# Altium PCB device_plate.PcbDoc
Units mm, origin at the board's own origin, x right, y up, seen from the top; angles counter-clockwise.
Board outline 42.5 x 25 mm, 2 copper layers (Top Layer, Bottom Layer), stack 1.5 mm thick; 22 components, 22 nets, 106 pads, 0 vias.
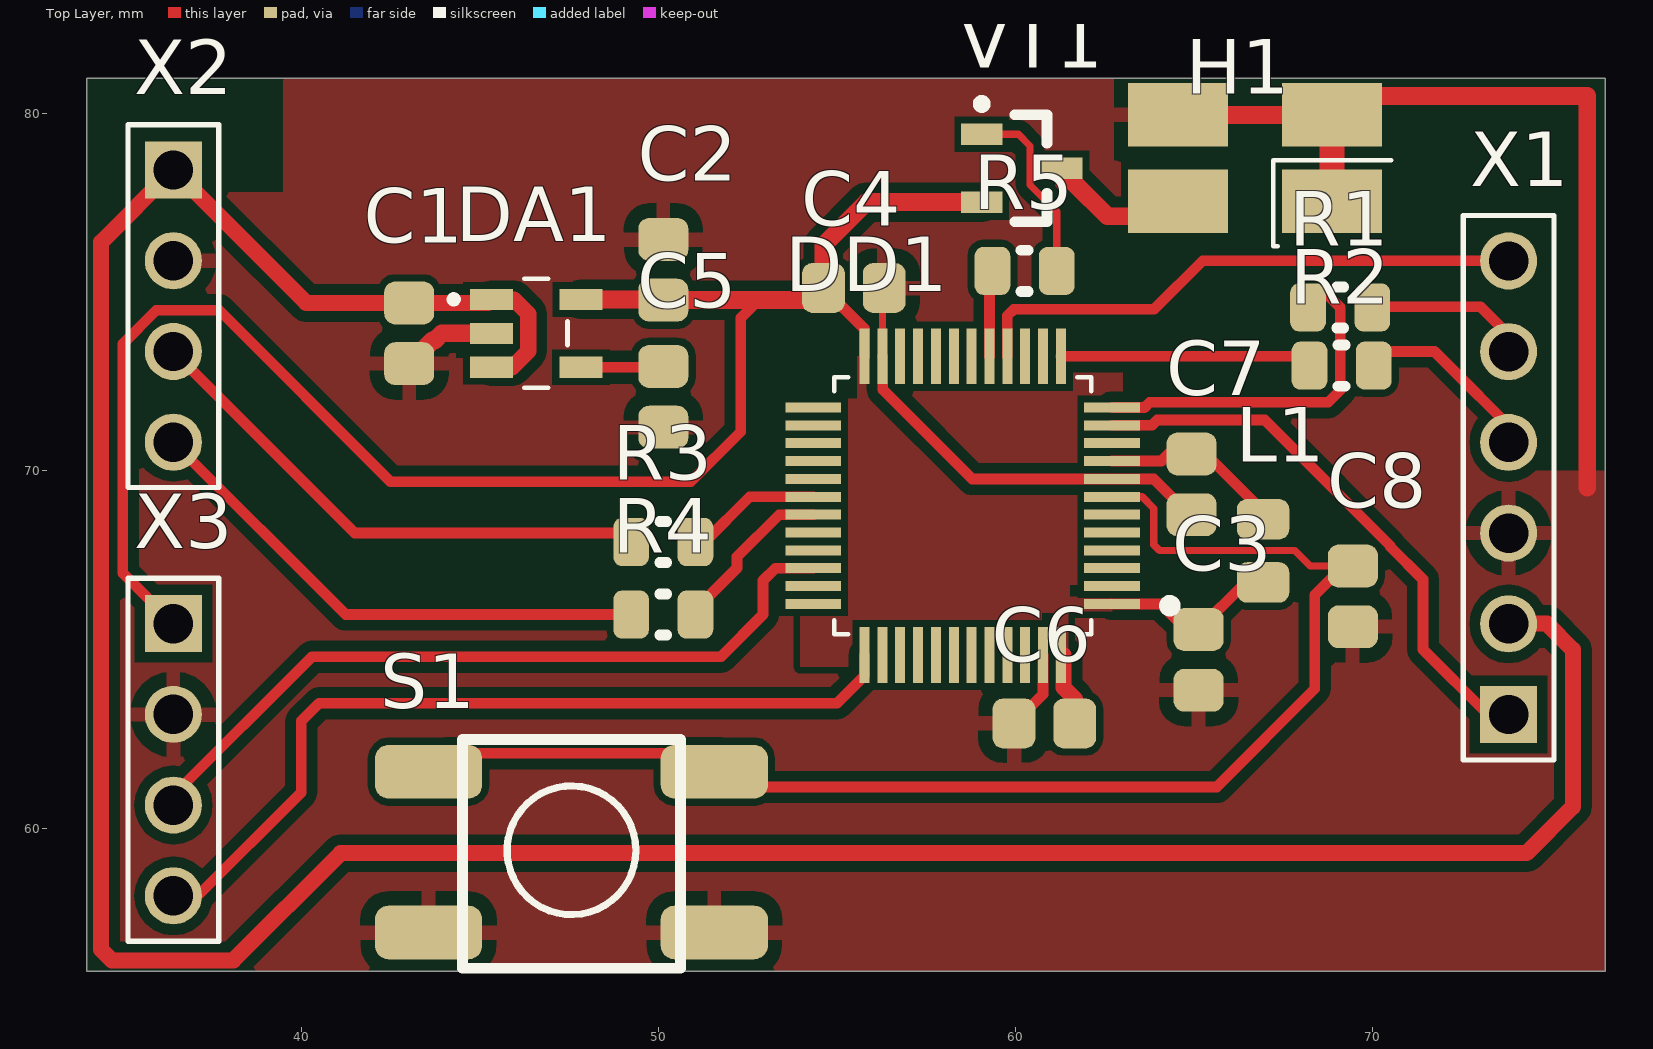
[diagram p0: Top Layer view]
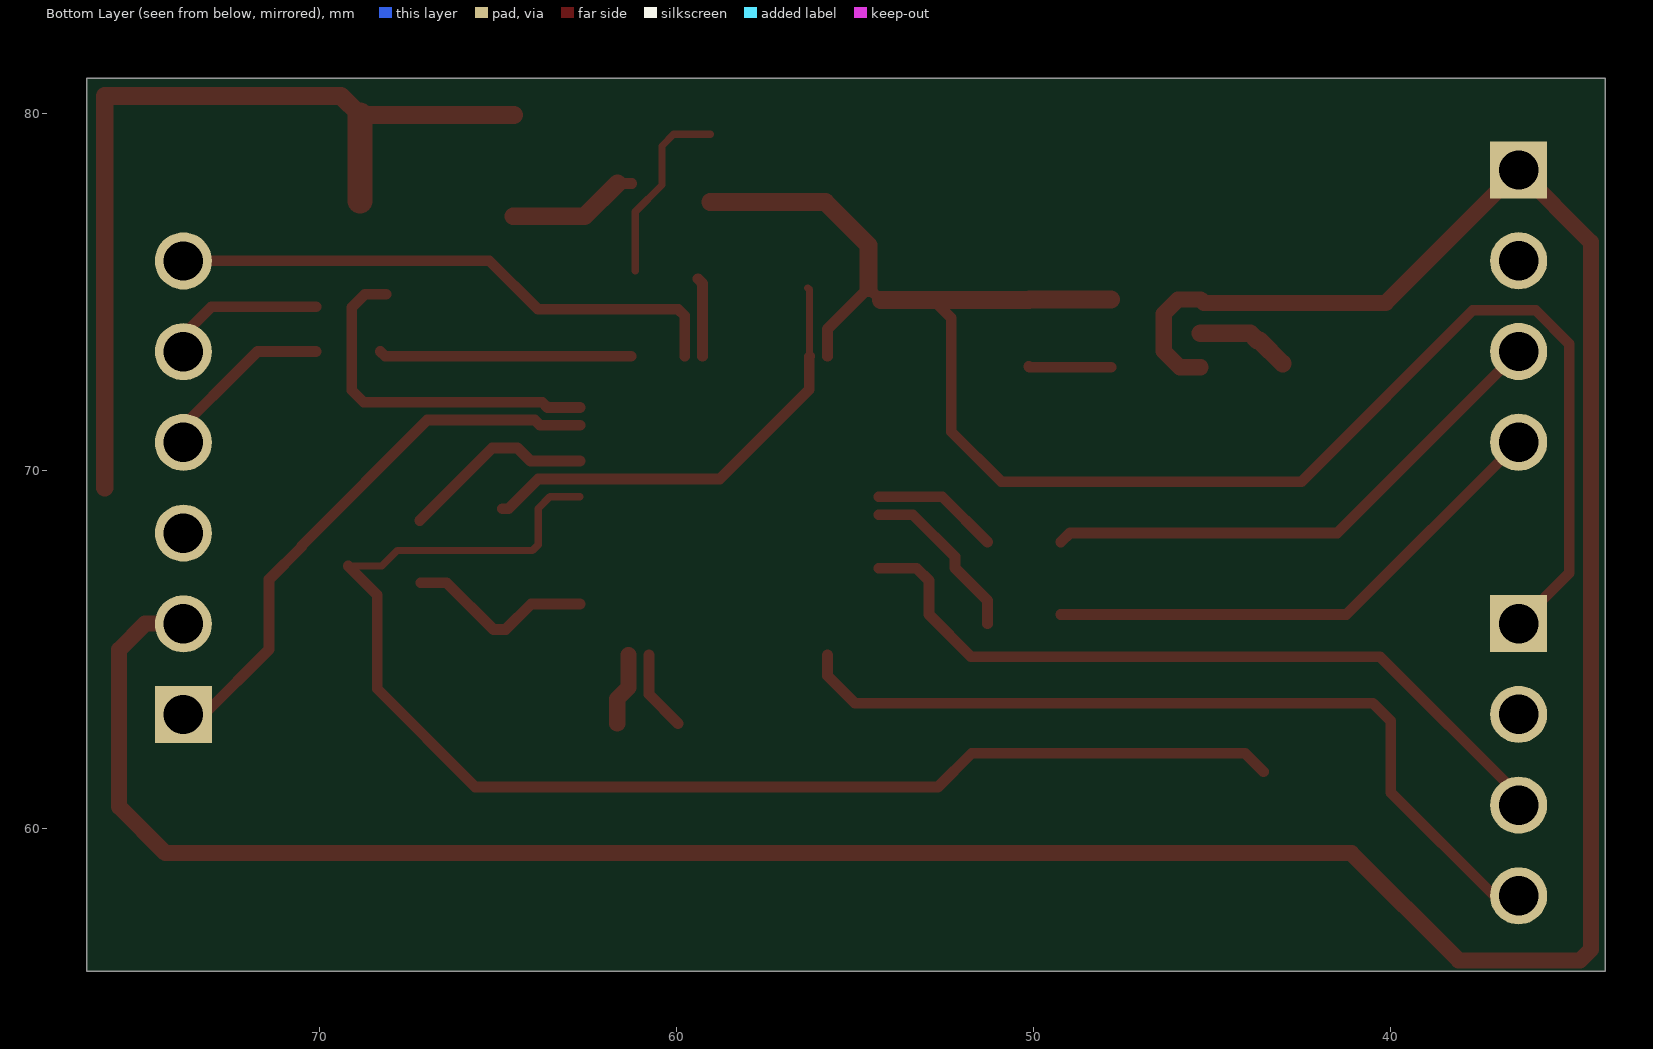
[diagram p1: Bottom Layer view, seen from below]

## Layer stack, top to bottom
Top Layer: signal copper (thickness not stored)
Dielectric 1: dielectric 1.5, FR-4, Dk 4.8
Bottom Layer: signal copper (thickness not stored)

## Board outline
34,56 34,81 76.5,81 76.5,56

## Design rules (kind name [scope] priority, off if disabled: settings)
Clearance [All] p1: gap=0.2 ignorepadtopadclearanceinfootprint=TRUE except(0.3: Arc-Fill Arc-Poly Arc-Region Track-Fill Track-Poly Track-Region THPad-Fill THPad-Poly THPad-Region)
PlaneClearance [All] p1: clearance=0.4
PlaneConnect [All] p1: planeconnectstyle=Relief reliefexpansion=0.508 reliefentries=4 reliefconductorwidth=0.254 reliefairgap=0.4
PolygonConnect [All] p1: connectstyle=Relief reliefconductorwidth=0.4 reliefentries=4 polygonreliefangle="90 Angle" airgapwidth=0.4
RoutingVias [All] p1: holewidth=0.711 width=1.27 viastyle="Through Hole" minholewidth=0.711 minwidth=1.27 maxholewidth=0.711 maxwidth=1.27
SolderMaskExpansion [All] p1: expansion=0.102
Width [All] p1: maxlimit=0.7 minlimit=0.2 preferedwidth=0.45 minimp=50.000000 maximp=50.000000 favimp=50.000000
28 further rules are at their usual default settings.

## Components (designator, comment, footprint, x,y, rotation, side; value= is the part's Value field where it differs from the comment)
C1 "0.1 мкФ" C_0805 43.023,73.854 r90 top
C2 "10 мкФ" C_0805 50.135,75.632 r270 top
C3 "0.1 мкФ" C_0805 65.121,64.71 r90 top
C4 "0.1 мкФ" C_0805 55.469,75.124 r180 top
C5 "0.1 мкФ" C_0805 50.135,72.076 r90 top
C6 "0.1 мкФ" C_0805 60.803,62.932 r0 top
C7 "0.1 мкФ" C_0805 64.925,69.625 r270 top
C8 "0.1 мкФ" C_0805 69.439,66.488 r90 top
DA1 "TPS73033DBVT" *SOT95P280X145-5N 46.579,73.854 r270 top
DD1 "STM32F030C8" *QFP50P900X900X160-48N 58.517,69.028 r180 top
H1 "LED" *PLCC-4 66.7,78.7 r0 top
L1 "10 мкГн" L_0805 66.925,67.765 r270 top
R1 "220 Ом" R_0805 69.085,74.578 r180 top
R2 "220 Ом" R_0805 69.125,72.95 r180 top
R3 "220 Ом" R_0805 50.135,68.012 r180 top
R4 "220 Ом" R_0805 50.135,65.98 r180 top
R5 "100 КОм" R_0805 60.25,75.6 r180 top
S1 "NO12_34" SMD_SWITCH 51.564,57.081 r180 top
VT1 "PNP_BEC" SOT-23_N 60.175,78.475 r0 top
X1 "X_6" PLS-6 73.8,69.53 r90 top
X2 "X_4" PLS-4 36.419,74.616 r270 top
X3 "X_4" PLS-4 36.419,61.916 r270 top

## Footprints (in the part's own frame and the unit in brackets; to place one, negate y for a bottom-side part, rotate by r counter-clockwise, add the part's x,y. Pads: shape width x height; smd on the part's side, far side on the other; paste and mask are expansions set on the pad)
*PLCC-4 [mil]
  rect 110x70 smd: 1(85,-45) 2(-85,-45) 3(-85,50) 4(85,50)
  silkscreen extent 20,-95 150,0, body extent -72,-52 66,58, height 75
*QFP50P900X900X160-48N [mm]
  rect 1.56x0.28 smd: 1(-4.18,2.75) 2(-4.18,2.25) 3(-4.18,1.75) 4(-4.18,1.25) 5(-4.18,0.75) 6(-4.18,0.25) 7(-4.18,-0.25) 8(-4.18,-0.75) 9(-4.18,-1.25) 10(-4.18,-1.75) 11(-4.18,-2.25) 12(-4.18,-2.75) 25(4.18,-2.75) 26(4.18,-2.25) 27(4.18,-1.75) 28(4.18,-1.25) 29(4.18,-0.75) 30(4.18,-0.25) 31(4.18,0.25) 32(4.18,0.75) 33(4.18,1.25) 34(4.18,1.75) 35(4.18,2.25) 36(4.18,2.75)
  rect 0.28x1.56 smd: 13(-2.75,-4.18) 14(-2.25,-4.18) 15(-1.75,-4.18) 16(-1.25,-4.18) 17(-0.75,-4.18) 18(-0.25,-4.18) 19(0.25,-4.18) 20(0.75,-4.18) 21(1.25,-4.18) 22(1.75,-4.18) 23(2.25,-4.18) 24(2.75,-4.18) 37(2.75,4.18) 38(2.25,4.18) 39(1.75,4.18) 40(1.25,4.18) 41(0.75,4.18) 42(0.25,4.18) 43(-0.25,4.18) 44(-0.75,4.18) 45(-1.25,4.18) 46(-1.75,4.18) 47(-2.25,4.18) 48(-2.75,4.18)
  silkscreen extent -5.95,-3.6 3.6,3.6, body extent -4.5,-4.5 4.5,4.5, height 1.61
*SOT95P280X145-5N [mm]
  rect 0.59x1.21 smd: 1(-0.95,-1.255) 2(0,-1.255) 3(0.95,-1.255) 4(0.95,1.255) 5(-0.95,1.255)
  silkscreen extent -1.53,-2.41 1.53,0.87, body extent -1.45,-1.4 1.45,1.4, height 1.31
C_0805 [mm] "Chip Capacitor, 2-Leads, Body 2.00x1.25mm, IPC Medium Density"
  rrect50% 1.2x1.4 smd: 1(-0.85,0) 2(0.85,0)
  body extent -1.1,-0.72 1.1,0.72, height 1.45
L_0805 [mm] "Chip Inductor, 2-Leads, Body 2.00x1.25mm, IPC Medium Density"
  rrect50% 1.13x1.47 smd: 1(-0.885,0) 2(0.885,0)
  body extent -1.1,-0.72 1.1,0.72, height 1
PLS-4 [mm]
  rect 1.6x1.6 hole 1.1: 1(-3.81,0)
  round 1.6 hole 1.1: 2(-1.27,0) 3(1.27,0) 4(3.81,0)
  silkscreen extent -5.08,-1.27 5.08,1.27, body extent -5.08,-1.27 5.08,1.27, height 8.5
PLS-6 [mm]
  rect 1.6x1.6 hole 1.1: 1(-6.35,0)
  round 1.6 hole 1.1: 2(-3.81,0) 3(-1.27,0) 4(1.27,0) 5(3.81,0) 6(6.35,0)
  silkscreen extent -7.62,-1.27 7.62,1.27, body extent -7.62,-1.27 7.62,1.27, height 8.5
R_0805 [mm] "Chip Resistor, 2-Leads, Body 2.00x1.25mm, IPC Medium Density"
  rrect50% 1x1.35 smd: 1(-0.9,0) 2(0.9,0)
  silkscreen extent -0.1,-0.58 0.1,0.58, body extent -1.05,-0.67 1.05,0.67, height 0.6
SMD_SWITCH [mm]
  rrect50% 3x1.5 smd: 1(0,0) 2(8,0) 3(0,-4.5) 4(8,-4.5)
  silkscreen extent 0.95,-5.4 7.05,1, body extent -1,-5.2 9,0.8, height 4.97
SOT-23_N [mm] "SOT23, 3-Leads, Body 2.9x1.3mm, Pitch 0.95mm, Lead Span 2.5mm, IPC Medium Density"
  rect 1.15x0.6 smd: 1(-1.125,0.95) 2(-1.125,-0.95) 3(1.125,0)
  silkscreen extent -1.25,-1.5 0.7,1.92, body extent -0.7,-1.5 0.7,1.5, height 1.1

## Part data
C1 C2 C3 C4 C5 C6 C7 C8: library part C
L1: library part L
R1 R2 R3 R4 R5: library part R
X1: 1addres=A1-XS1:1, 1circuit_param=KEY, 2addres=A1-XS1:2, 2circuit_param=+5В, 3addres=A1-XS1:3, 3circuit_param=GND, 4addres=A1-XS1:4, 4circuit_param=TX, 5addres=A1-XS1:5, 5circuit_param=RX, 6addres=A1-XS1:6, 6circuit_param=STATE
X2: 1addres=A1-X2:1, 1circuit_param=+5В, 2addres=A1-X2:2, 2circuit_param=GND, 3addres=A1-X2:3, 3circuit_param=TX, 4addres=A1-X2:4, 4circuit_param=RX
X3: 1addres=A1-X3:1, 1circuit_param=VDD, 2addres=A1-X3:2, 2circuit_param=GND, 3addres=A1-X3:3, 3circuit_param=SWDIO, 4addres=A1-X3:4, 4circuit_param=SWCLK

## Nets (pads, with @x,y where several pads share a name; then routed paths per layer and width w, separated by ;. In a path a pad name is that pad's centre, name@x,y a point inside that pad or via, vN(x,y) a via of type N, cw(c..) or ccw(c..) an arc to the next point about the centre after c; other vN are vias at no path point)
+5: C1.2 DA1.1 DA1.3 X1.2 X2.1 | length 85.8
  Top Layer w0.45: DA1.3 45.904,72.904 46.354,73.354 46.354,74.4 45.95,74.804 DA1.1 45.224,74.704 C1.2 40.141,74.704 X2.1 34.4,76.407 34.4,56.6 34.7,56.3 38.1,56.3 41.1,59.3 74.3,59.3 75.6,60.6 75.6,65 74.874,65.726 X1.2@74.265,65.726
GND: C1.1 C2.1 C3.1 C4.1 C5.1 C6.1 C7.2 C8.1 DA1.2 DD1.8 DD1.23 DD1.47 H1.1 H1.3 H1.4 S1.1 S1.2 X1.3 X2.2 X3.2 | length 42.8
  Top Layer w0.2: DD1.23 56.267,75.072 C4.1
  Top Layer w0.3: DD1.23 56.277,73.198 56.277,72.283 58.782,69.778 DD1.8 63.863,69.778 64.701,68.94 C7.2@64.867,68.94 ; C6.1 60.767,63.746 DD1.47
  Top Layer w0.5: C1.1 43.673,73.654 43.734,73.654 43.934,73.854 DA1.2 ; H1.3 H1.4 69.389,80.5 76,80.5 76,69.53
  Top Layer w0.7: H1.1 H1.4
GNDA: 
NetC5_2: C5.2 DA1.4 | length 2.3
  Top Layer w0.3: DA1.4 50.113,72.904 C5.2
NetC7_1: C7.1 DD1.9 L1.1 | length 5.5
  Top Layer w0.3: DD1.9 64.085,70.278 64.447,70.64 64.867,70.64 65.156,70.64 L1.1@67.186,68.611
NetC8_2: C8.2 DD1.7 S1.3 S1.4 | length 38.2
  Top Layer w0.2: DD1.7 63.541,69.278 63.867,68.952 63.867,67.933 64.022,67.778 67.807,67.778 68.247,67.338 C8.2@69.185,67.338
  Top Layer w0.3: S1.4 44.081,62.098 51.731,62.098 52.675,61.154 65.629,61.154 68.375,63.9 68.375,66.528 C8.2@69.185,67.338
NetDD1_11: DD1.11 X1.1 | length 16.2
  Top Layer w0.3: DD1.11 63.815,71.278 63.962,71.425 66.971,71.425 70.489,67.907 70.489,67.876 71.4,66.965 71.4,65 73.214,63.186 X1.1@74.265,63.186
NetDD1_12: DD1.12 R1.2 | length 10
  Top Layer w0.3: DD1.12 63.608,71.778 63.755,71.925 68.75,71.925 69.085,72.26 69.085,74.578 68.713,74.95 R1.2@68.125,74.95
NetDD1_13: DD1.13 R2.2 | length 7.1
  Top Layer w0.3: DD1.13 68.147,73.208 R2.2@68.285,73.346
NetDD1_16: DD1.16 X1.6 | length 16.3
  Top Layer w0.3: DD1.16 59.767,74.342 59.95,74.525 63.875,74.525 65.236,75.886 X1.6@74.265,75.886
NetDD1_17: DD1.17 R5.2 | length 2.2
  Top Layer w0.3: DD1.17 59.267,75.25 R5.2@59.395,75.378
NetDD1_30: DD1.30 R3.1 | length 3.6
  Top Layer w0.3: R3.1@51.289,68.012 52.555,69.278 DD1.30
NetDD1_31: DD1.31 R4.1 | length 4.9
  Top Layer w0.3: R4.1@51.289,65.726 51.289,66.372 52.2,67.283 52.2,67.6 53.378,68.778 DD1.31
NetDD1_34: DD1.34 X3.3 | length 21.4
  Top Layer w0.3: X3.3 36.419,60.919 40.3,64.8 51.749,64.8 52.929,65.98 52.929,66.931 53.276,67.278 DD1.34
NetDD1_37: DD1.37 X3.4 | length 23.7
  Top Layer w0.3: X3.4 37.106,58.106 40,61 40,63 40.5,63.5 55,63.5 55.767,64.267 DD1.37
NetH1_1: H1.2 VT1.3 | length 3.7
  Top Layer w0.3: 61.25,78.05 61.65,78.05
  Top Layer w0.5: 61.65,78.05 62.568,77.132 H1.2@64.566,77.132
NetR1_1: R1.1 X1.5 | length 4.7
  Top Layer w0.3: R1.1@70.085,74.6 73.011,74.6 X1.5@74.265,73.346
NetR2_1: R2.1 X1.4 | length 5.2
  Top Layer w0.3: R2.1@70.085,73.346 71.725,73.346 X1.4@74.265,70.806
NetR3_2: R3.2 X2.3 | length 15
  Top Layer w0.3: X2.3 41.499,68.266 48.981,68.266 R3.2
NetR4_2: R4.2 X2.4 | length 14.8
  Top Layer w0.3: X2.4 41.245,65.98 R4.2
NetR5_1: R5.1 VT1.1 | length 5.3
  Top Layer w0.2: VT1.1 60.075,79.425 60.4,79.1 60.4,78.005 61.15,77.255 R5.1
VDD: C2.2 C3.2 C4.2 C6.2 DA1.5 DD1.1 DD1.24 DD1.48 L1.2 VT1.2 X3.1 | length 55.4
  Top Layer w0.3: X3.1 35,67.145 35,73.553 35.943,74.496 37.704,74.496 42.5,69.7 50.9,69.7 52.3,71.1 52.3,74.282 52.8,74.782 ; C2.2@50.113,74.804 C2.2 ; C4.2@54.277,74.782 C4.2 55.767,73.976 DD1.24 ; DD1.1 64.061,66.278 64.779,65.56 C3.2 66.434,66.873 L1.2@67.153,66.873
  Top Layer w0.45: DD1.48@61.342,64.848 61.342,63.933 61.653,63.622 C6.2
  Top Layer w0.5: DA1.5 C2.2@50.113,74.804 ; C2.2 52.8,74.782 C4.2@54.277,74.782 ; C4.2 54.619,76.319 55.825,77.525 VT1.2
pads on no net: DD1.2 DD1.3 DD1.4 DD1.5 DD1.6 DD1.10 DD1.14 DD1.15 DD1.18 DD1.19 DD1.20 DD1.21 DD1.22 DD1.25 DD1.26 DD1.27 DD1.28 DD1.29 DD1.32 DD1.33 DD1.35 DD1.36 DD1.38 DD1.39 DD1.40 DD1.41 DD1.42 DD1.43 DD1.44 DD1.45 DD1.46

## Polygon pours and split planes (outlines as drawn)
no net on Bottom Layer "Bottom Layer-No Net" (solid, pour order 14): 34,81
GND on Top Layer (solid, pour order 38): 35.2,77.8 39.5,77.8 39.5,81.1 39.6,81 73,81 73,70 76.5,70 76.5,56 35,56 34.7,56.3
VDD on Top Layer (solid, pour order 30): 53.975,73.55 63,73.55 63,64.525 53.975,64.525
no net on Top Layer (solid, pour order 34): 34,81
no net on Top Layer (solid, pour order 32): 34,81
no net on Top Layer "Top Layer-No Net 1" (solid, pour order 28): 34,81
no net on Top Layer "Top Layer-No Net 2" (solid, pour order 26): 34,81
no net on Top Layer "Top Layer-No Net" (solid, pour order 20): 34,81